# Altium PCB SeniorDesign_PowerBoard_Rev1.PcbDoc
Units mil, origin at the board's own origin, x right, y up, seen from the top; angles counter-clockwise.
Board outline 3000.05 x 2999.92 mil, 4 copper layers (Top Layer, Power, Ground, Bottom Layer), stack 64.6 mil thick; 60 components, 42 nets, 180 pads, 29 vias.
Unrouted connection lines stored in the file: 14.
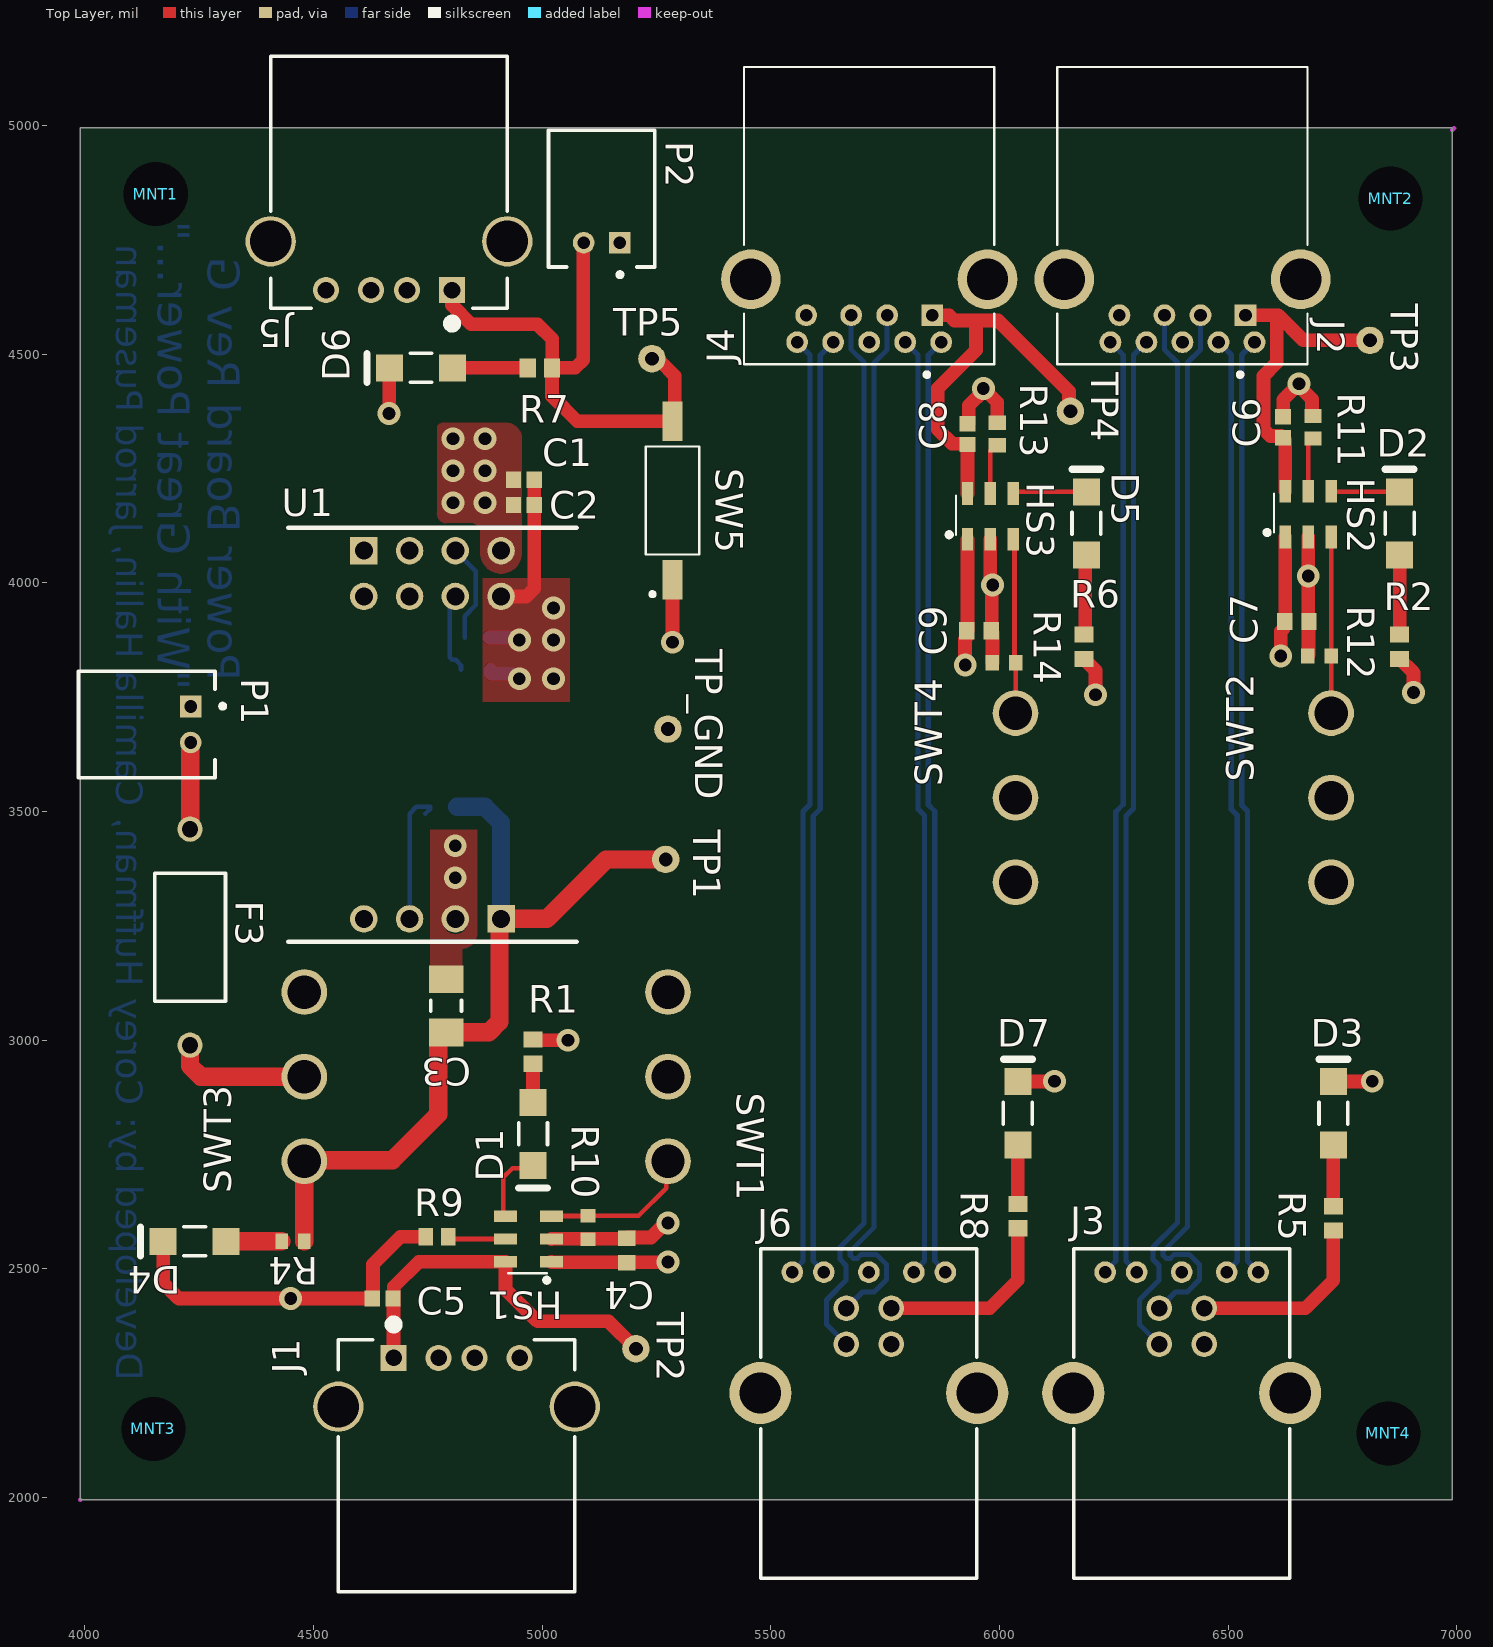
[diagram p0: Top Layer view]
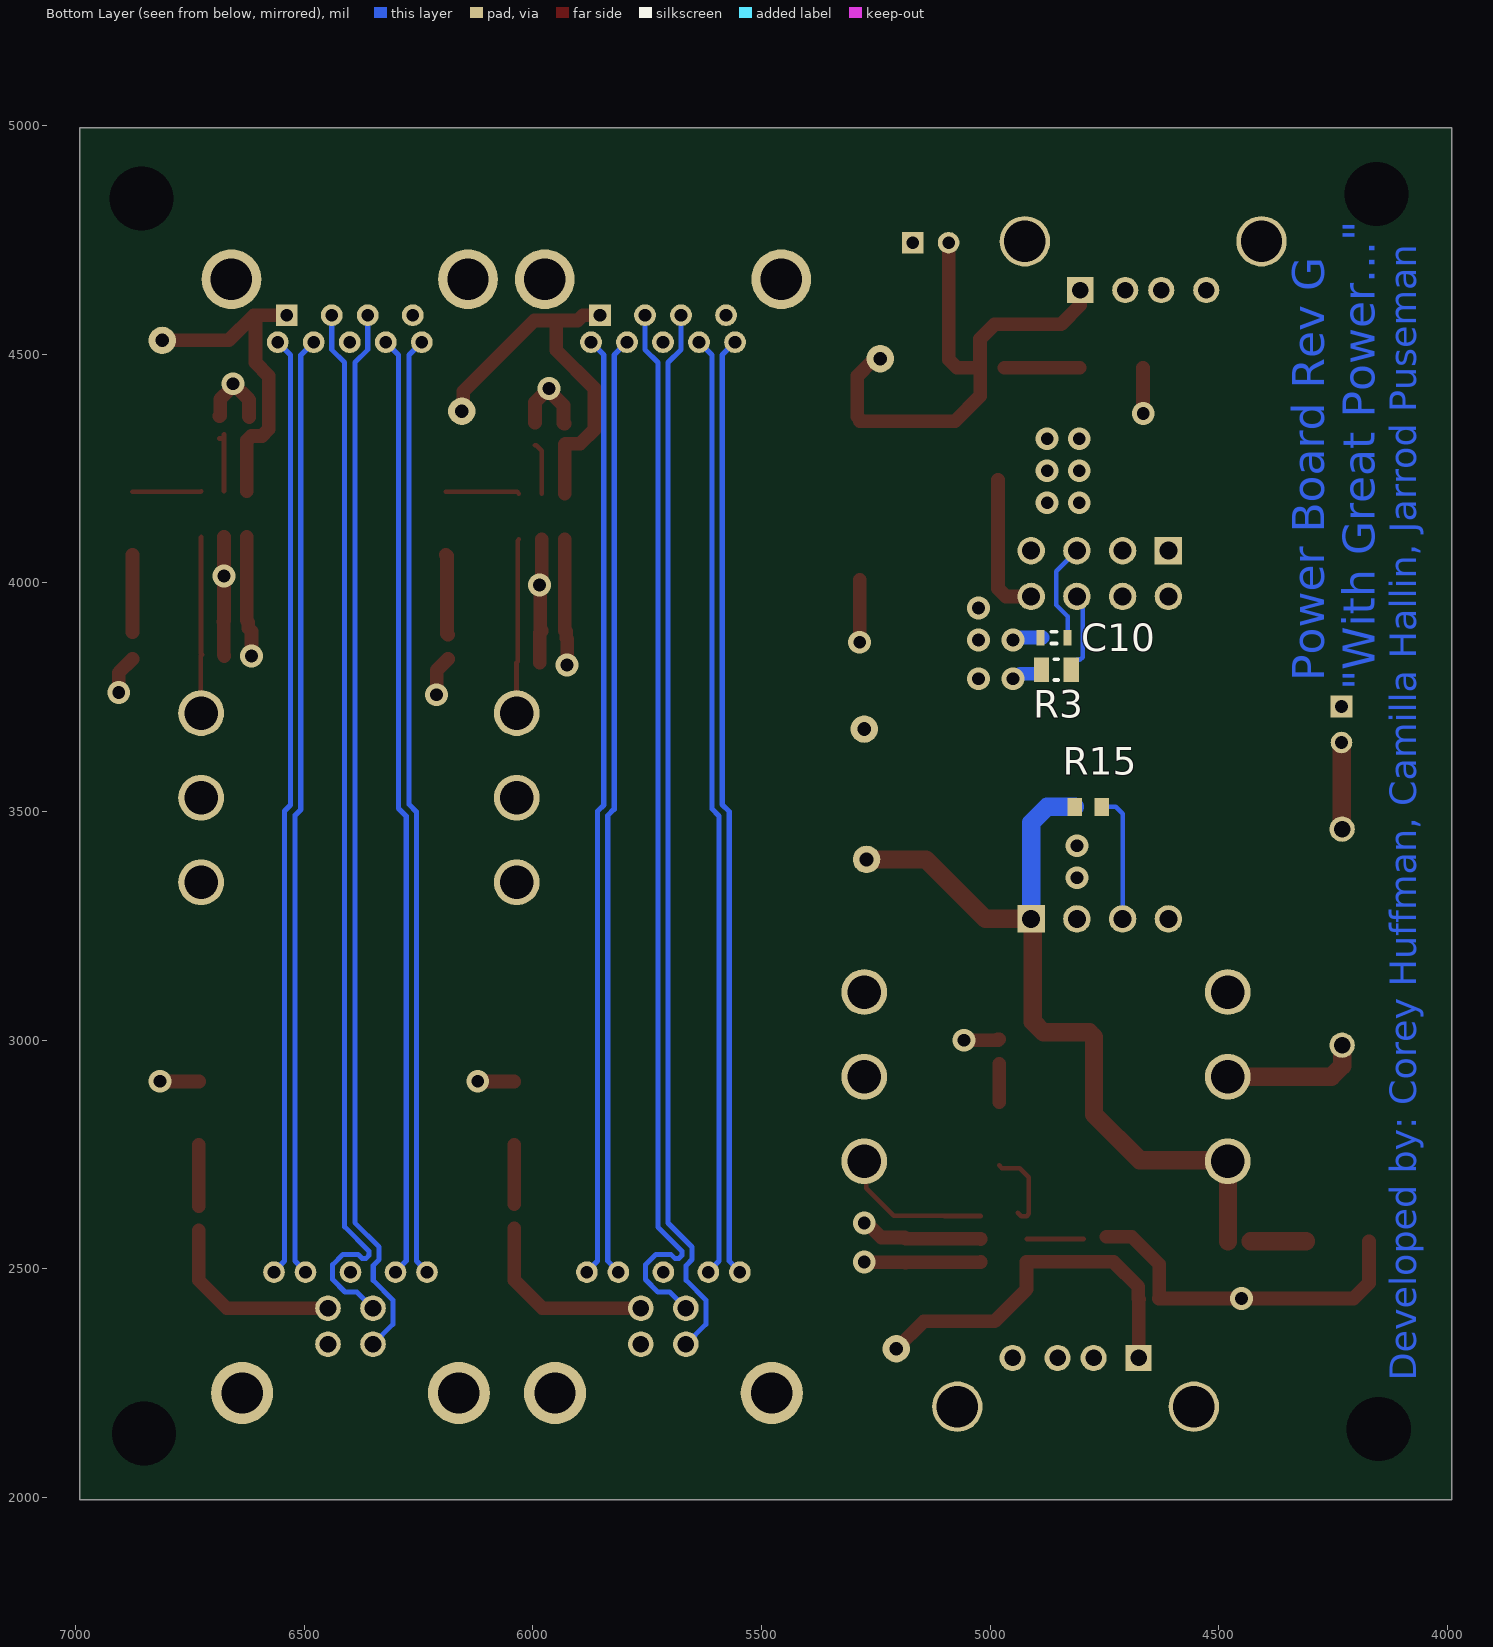
[diagram p1: Bottom Layer view, seen from below]
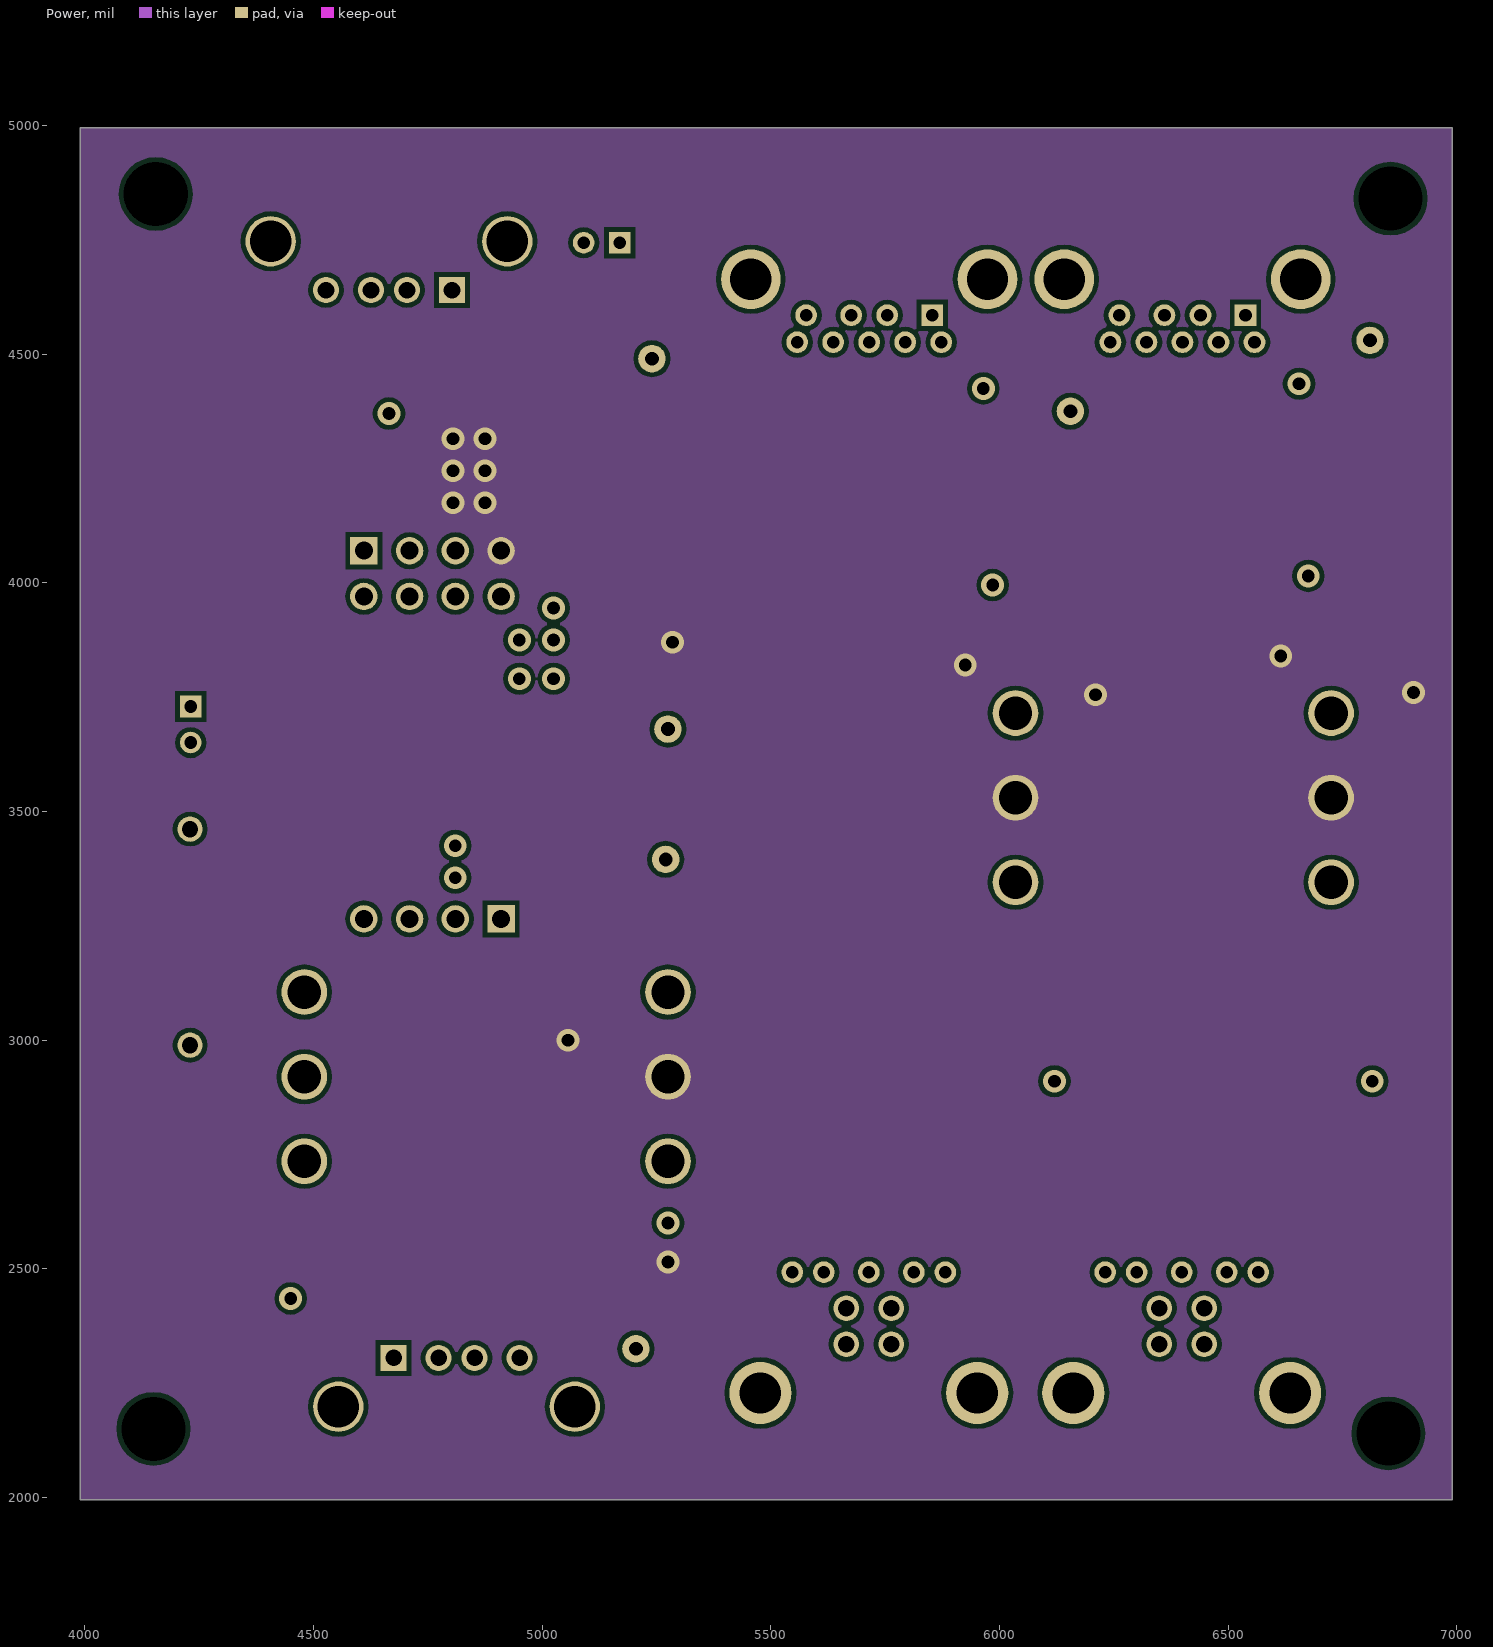
[diagram p2: Power]
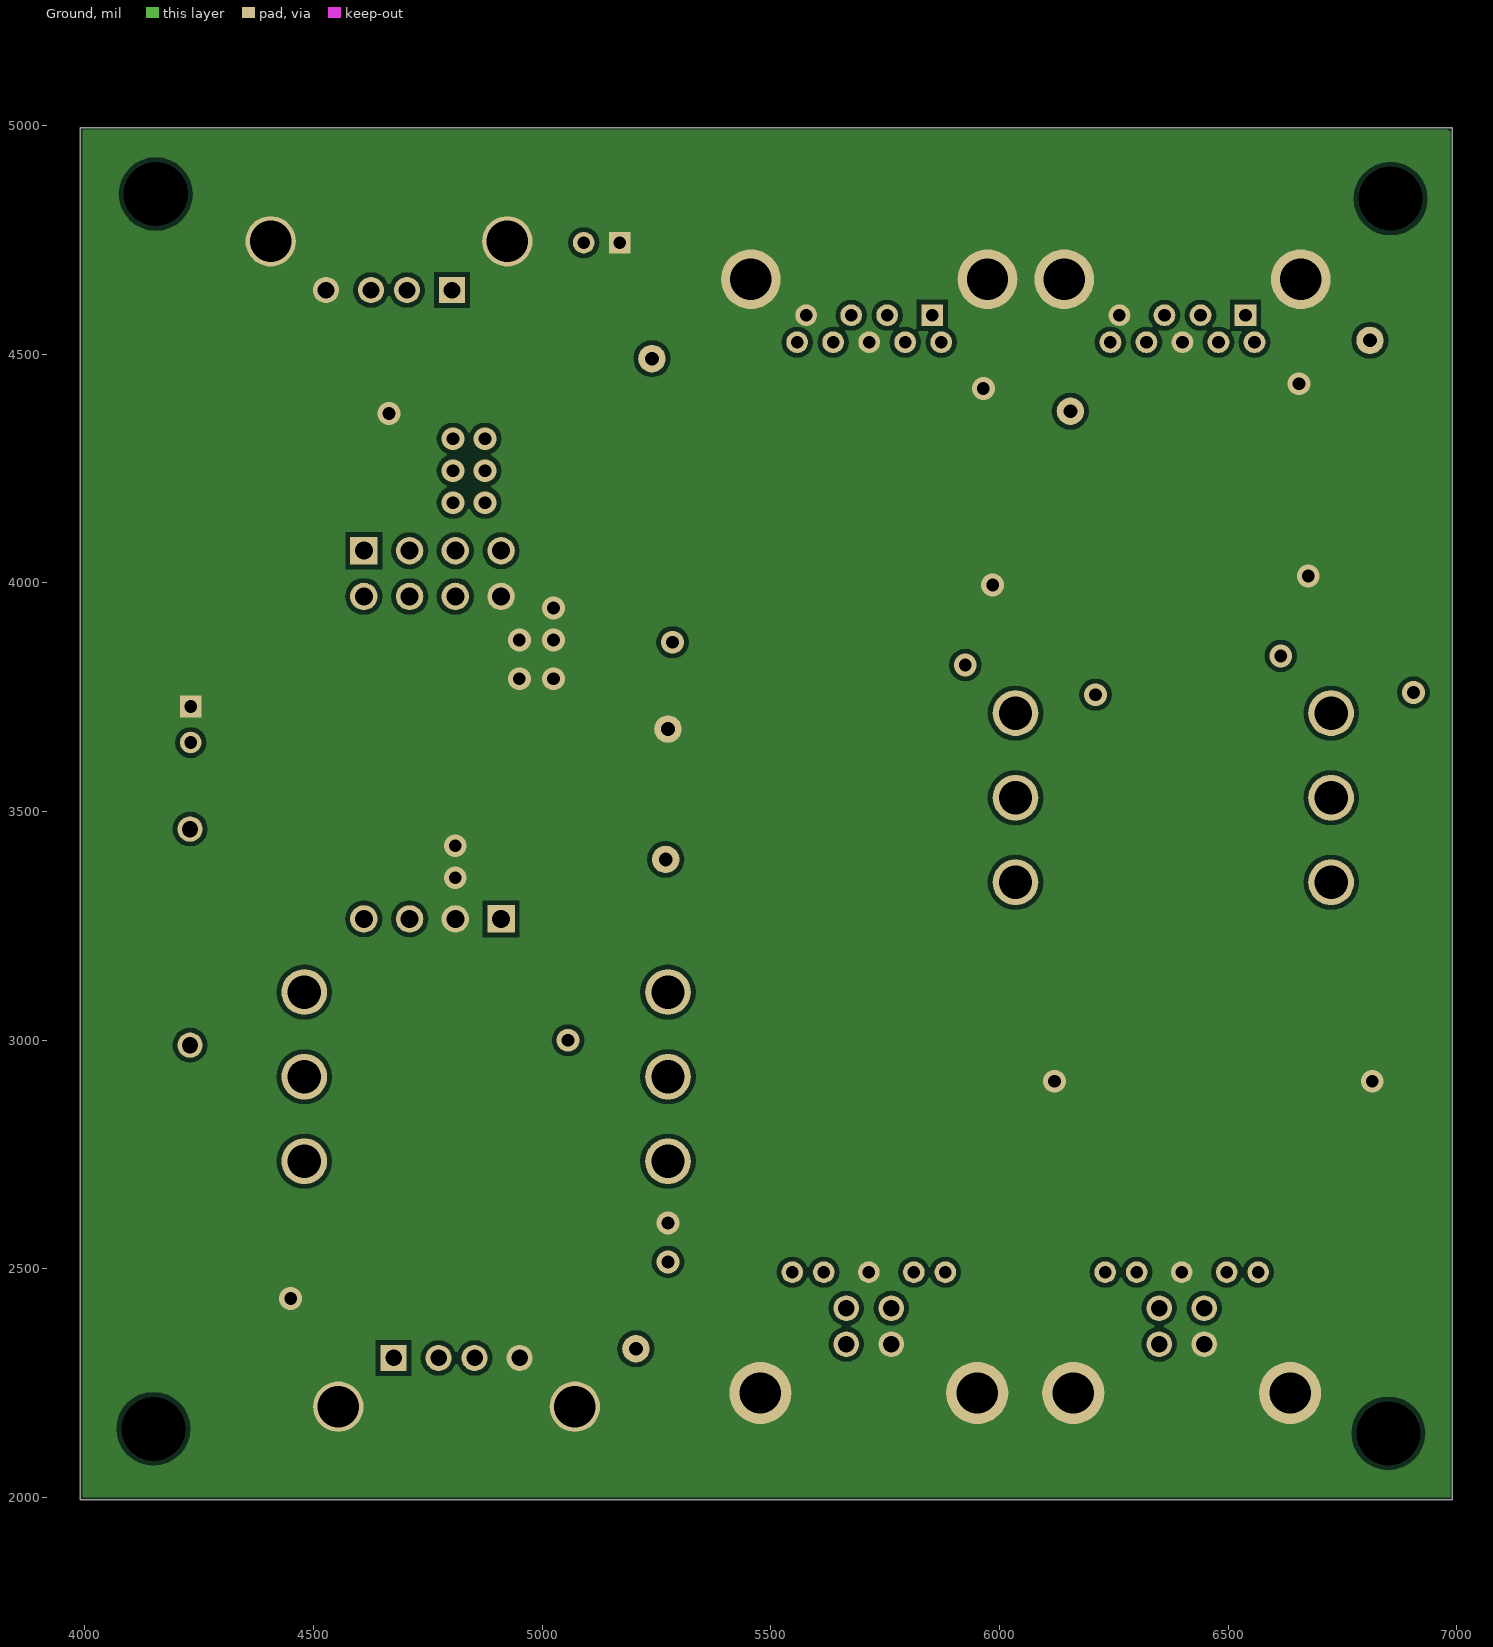
[diagram p3: Ground]

## Layer stack, top to bottom
Top Solder: solder mask 1, Solder Resist, Dk 3.5
Top Layer: signal copper 1.4
Dielectric 2: prepreg 6.7, FR-408, Dk 4.1
Power: signal copper 0.7
Dielectric 1: dielectric 47, FR-408, Dk 4.8
Ground: signal copper 0.7
Dielectric 3: prepreg 6.7, FR-408, Dk 4.1
Bottom Layer: signal copper 1.4
Bottom Solder: solder mask 1, Solder Resist, Dk 3.5

## Board outline
3989.95,1995.08 6990,1995.08 6990,4995 3989.95,4995

## Design rules (kind name [scope] priority, off if disabled: settings)
Clearance Clearance_1 [All] p1: gap=10 ignorepadtopadclearanceinfootprint=FALSE except(0: Arc-Hole Track-Hole SMDPad-Hole THPad-Hole Via-Hole Fill-Hole Poly-Hole Region-Hole Text-Hole)
Clearance [All] p2: gap=10 ignorepadtopadclearanceinfootprint=FALSE except(0: Arc-Hole Track-Hole SMDPad-Hole THPad-Hole Via-Hole Fill-Hole Poly-Hole Region-Hole Text-Hole)
DiffPairsRouting USB_DIFF_PAIR [All] p1: maxlimit=11 minlimit=10 mostfreqgap=11 toplayer_mingap=11 toplayer_minwidth=11 toplayer_maxwidth=11.5 toplayer_prefwidth=11.5 midlayer1_maxgap=10 midlayer1_prefgap=10 midlayer1_minwidth=15 midlayer1_maxwidth=15 midlayer1_prefwidth=15 midlayer2_maxgap=10 midlayer2_prefgap=10 midlayer2_minwidth=15 midlayer2_maxwidth=15 midlayer2_prefwidth=15 bottomlayer_mingap=11 bottomlayer_minwidth=11 bottomlayer_maxwidth=11.5 bottomlayer_prefwidth=11.5 maxuncoupledlength=500
DiffPairsRouting DiffPairsRouting_1 [All] p2: maxlimit=10 minlimit=10 mostfreqgap=10 toplayer_minwidth=15 toplayer_maxwidth=15 toplayer_prefwidth=15 midlayer1_minwidth=15 midlayer1_maxwidth=15 midlayer1_prefwidth=15 midlayer2_minwidth=15 midlayer2_maxwidth=15 midlayer2_prefwidth=15 bottomlayer_minwidth=15 bottomlayer_maxwidth=15 bottomlayer_prefwidth=15 maxuncoupledlength=500
Height [All] p1: minheight=0 maxheight=1500 prefheight=500
HoleSize [All] p1: absolutevalues=TRUE maxlimit=140 minlimit=1 maxpercent=80.000 minpercent=20.000
PlaneConnect [All] p1: planeconnectstyle=Direct reliefexpansion=20 reliefentries=4 reliefconductorwidth=10 reliefairgap=10
PolygonConnect [All] p1: connectstyle=Direct reliefconductorwidth=10 reliefentries=4 polygonreliefangle="90 Angle" airgapwidth=10
RoutingVias [All] p1: holewidth=28 width=50 viastyle="Through Hole" minholewidth=28 minwidth=50 maxholewidth=28 maxwidth=50
SolderMaskExpansion [All] p1: expansion=4 istentingtop=FALSE
Width 5V_Width [InNetClass('5V_Line')] p1: maxlimit=50 minlimit=10 preferedwidth=30 toplayer_minwidth=30 midlayer1_maxwidth=10 midlayer1_prefwidth=10 midlayer2_maxwidth=10 midlayer2_prefwidth=10 bottomlayer_minwidth=30 minimp=50.000000 maximp=50.000000 favimp=50.000000
Width 28V_Width [InNetClass('28V_Line')] p2: maxlimit=50 minlimit=10 preferedwidth=40 toplayer_minwidth=40 midlayer1_maxwidth=10 midlayer1_prefwidth=10 midlayer2_maxwidth=10 midlayer2_prefwidth=10 bottomlayer_minwidth=40 minimp=50.000000 maximp=50.000000 favimp=50.000000
Width C_GND [InNetClass('C_GND')] p3: maxlimit=50 minlimit=10 preferedwidth=30 toplayer_minwidth=30 midlayer1_maxwidth=10 midlayer1_prefwidth=10 midlayer2_maxwidth=10 midlayer2_prefwidth=10 bottomlayer_minwidth=30 minimp=50.000000 maximp=50.000000 favimp=50.000000
Width [All] p4: maxlimit=10 minlimit=10 preferedwidth=10
26 further rules are at their usual default settings.

## Classes and differential pairs
differential pair class USB_DIFF_PAIR: D2 D4 SSRX2 SSRX4 SSTX2 SSTX4
net class C_GND: GND
net class 28V_Line: NetC3_2 NetD4_1 NetF3_1 NetF3_2
net class 5V_Line: 5V NetC5_1 NetC6_1 NetC8_1 NetD1_1 NetD2_1 NetD3_1 NetD5_1 NetD6_1 NetD7_1 NetJ3_1 NetJ5_1 NetJ6_1
differential pair SSTX4: +SSTX4_P -SSTX4_N
differential pair SSTX2: +SSTX2_P -SSTX2_N
differential pair SSRX4: +SSRX4_P -SSRX4_N
differential pair SSRX2: +SSRX2_P -SSRX2_N
differential pair D4: +D4_P -D4_N
differential pair D2: +D2_P -D2_N

## Components (designator, comment, footprint, x,y, rotation, side; value= is the part's Value field where it differs from the comment)
C1 "GRM188R61A226ME15D" CAPC1608X100X38LL20T18 4960,4225 r180 top
C2 "GRM188R61A226ME15D" CAPC1608X100X38LL20T18 4960,4170 r180 top
C3 "GRM31CR71H475KA12L" MURA-1206_H_1.8_M 4790,3075 r270 top
C4 "GRM188R60J106ME47D" CAPC1608X90X35NL10T15 5185,2540 r270 top value=10uF
C5 "GRM188R61A226ME15D" CAPC1608X100X38LL20T18 4651.2,2434.88 r180 top
C6 "GRM188R61A226ME15D" CAPC1608X100X38LL20T18 6620,4340 r90 top
C7 "GRM188R60J106ME47D" CAPC1608X90X35NL10T15 6650,3915 r180 top value=10uF
C8 "GRM188R61A226ME15D" CAPC1608X100X38LL20T18 5930,4325 r90 top
C9 "GRM188R60J106ME47D" CAPC1608X90X35NL10T15 5955,3895 r180 top value=10uF
C10 "C1608X5R1H105K080AB" CAPC1608X90X20LL10 4860,3880 r0 bottom
D1 "HSMH-C150" AVAG-HSMX-C150_V 4980,2795 r270 top
D2 "HSMH-C150" AVAG-HSMX-C150_V 6875,4130 r90 top
D3 "HSMG-C150" AVAG-HSMX-C150_V 6730,2840 r90 top
D4 "HSMH-C150" AVAG-HSMX-C150_V 4240,2560 r180 top
D5 "HSMH-C150" AVAG-HSMX-C150_V 6190,4130 r90 top
D6 "HSMH-C150" AVAG-HSMX-C150_V 4735,4470 r180 top
D7 "HSMG-C150" AVAG-HSMX-C150_V 6040,2840 r90 top
F3 "0263.500WRT1L" LFUS-263-2_V1 4230,3225 r270 top
HS1 "HotSwap" Hot_Swap 4970,2565 r90 top
HS2 "HotSwap" Hot_Swap 6675,4150 r0 top
HS3 "HotSwap" Hot_Swap 5980,4145 r0 top
J1 "292303-1" TE-292303-1_V 4812.8,2259.96 r0 top
J2 "GSB311131HR" *AMPHENOL_GSB311131HR_GSB311131HR(Primary) 6400,4585 r180 top
J3 "692221030100" 692221030100 6398.32,2183.07 r0 top
J4 "GSB311131HR" *AMPHENOL_GSB311131HR_GSB311131HR(Primary) 5715,4585 r180 top
J5 "292303-1" TE-292303-1_V 4665,4685 r180 top
J6 "692221030100" 692221030100 5714.18,2183.07 r0 top
MNT1 ".14in" Screw_hole 4150,4845 r0 top locked
MNT2 ".14in" Screw_hole 6860,4845 r180 top locked
MNT3 ".14in" Screw_hole 4145,2145 r0 top locked
MNT4 ".14in" Screw_hole 6845,2135 r0 top locked
P1 "S2B-PH-K-S(LF)(SN)" JST-S2B-PH-K-S_V 4135,3690 r270 top
P2 "S2B-PH-K-S(LF)(SN)" JST-S2B-PH-K-S_V 5130,4840 r180 top
R1 "CRCW06031K00JNEB" RESC1609X50X30ML10T20 4980,2975 r90 top value=1kOhm
R2 "CRCW06031K00JNEB" RESC1609X50X30ML10T20 6875,3860 r270 top value=1kOhm
R3 "CRCW08050000Z0EA" RESC2013X50X30LL20T20 4855,3810 r180 bottom value=0Ohm
R4 "ERJ-3GEYJ153V" RESC1608X55X30LL15T15 4455,2560 r0 top value=15kOhm
R5 "CRCW06031K00JNEB" RESC1609X50X30ML10T20 6730,2610 r90 top value=1kOhm
R6 "CRCW06031K00JNEB" RESC1609X50X30ML10T20 6185,3860 r270 top value=1kOhm
R7 "CRCW06031K00JNEB" RESC1609X50X30ML10T20 4995,4470 r0 top value=1kOhm
R8 "CRCW06031K00JNEB" RESC1609X50X30ML10T20 6040,2615 r90 top value=1kOhm
R9 "CRCW060319K6FKEA" RESC1609X50X30NL10T20 4770,2570 r180 top value=19.6kOhm
R10 "ERJ3EKF1002V" RESC1609X55X30LL15T15 5100,2590 r270 top
R11 "CRCW060319K6FKEA" RESC1609X50X30NL10T20 6685,4340 r90 top value=19.6kOhm
R12 "ERJ3EKF1002V" RESC1609X55X30LL15T15 6700,3840 r180 top
R13 "CRCW060319K6FKEA" RESC1609X50X30NL10T20 5995,4325 r90 top value=19.6kOhm
R14 "ERJ3EKF1002V" RESC1609X55X30LL15T15 6010,3825 r180 top
R15 "RC0603FR-0710KL" RESC1608X55X25ML10T15 4785,3510 r180 bottom
SW5 "418121160801" 418121160801 5285,4180 r0 top
SWT1 "Toggle_Swt" Toggle_Swt 5275,2920 r90 top
SWT2 "Toggle_Swt" Toggle_Swt 6725,3530 r270 top
SWT3 "Toggle_Swt" Toggle_Swt 4480,2920 r90 top
SWT4 "Toggle_Swt" Toggle_Swt 6035,3530 r270 top
TP1 "TestPoint" TestPoint 5270,3395 r90 top
TP2 "TestPoint" TestPoint 5205,2325 r90 top
TP3 "TestPoint" TestPoint 6810,4530 r270 top
TP4 "TestPoint" TestPoint 6155,4375 r90 top
TP5 "TestPoint" TestPoint 5240,4490 r0 top
TP_GND "TestPoint" TestPoint 5275,3680 r90 top
U1 "DC/DC Converter" DCDC_Reg 4760,3665 r90 top

## Footprints (in the part's own frame and the unit in brackets; to place one, negate y for a bottom-side part, rotate by r counter-clockwise, add the part's x,y. Pads: shape width x height; smd on the part's side, far side on the other; paste and mask are expansions set on the pad)
418121160801 [mm] "01p, 2.54mm Pitch, Horizontal, IC Type, SMT, flat Actuator, black, with Tape, T&R"
  rect 1.1x2.2 smd: 1(0,-4.4) 2(0,4.4)
  silkscreen extent -1.49,-5.31 1.49,3, body extent -1.49,-4.95 1.49,4.95, height 3.26
692221030100 [mm] "USB 3.0 Type B Horizontal"
  round 1.42 hole 0.92: 1(1.25,5.86) 2(-1.25,5.86) 3(-1.25,3.86) 4(1.25,3.86)
  round 1.2 hole 0.7: 5(-4.25,7.86) 6(-2.5,7.86) 7(0,7.86) 8(2.5,7.86) 9(4.25,7.86)
  round 3.45 hole 2.3: Shell(-6.02,1.15) Shell(6.02,1.15)
  silkscreen extent -6,-9.15 6,9.15, body extent -7.2,-9.15 7.2,9.15, height 12.93
*AMPHENOL_GSB311131HR_GSB311131HR(Primary) [mm]
  rect 1.208x1.208 hole 0.7: 1(-3.5,0)
  round 1.208 hole 0.7: 2(-1,0) 3(1,0) 4(3.5,0) 5(4,1.5) 6(2,1.5) 7(0,1.5) 8(-2,1.5) 9(-4,1.5)
  round 3.316 hole 2.3: SH1(-6.57,-2) SH2(6.57,-2)
  silkscreen extent -6.95,-13.78 6.95,3.42, body extent -7.91,-13.71 7.91,2.79, height 7.57
AVAG-HSMX-C150_V [mm] "SMD, 2-Leads, Body 3.2x1.6mm"
  rect 1.5x1.5 smd: 1(-1.75,0) 2(1.75,0)
  silkscreen extent -0.6,-0.8 3,0.8, body extent -1.6,-0.8 1.6,0.8, height 1.1
CAPC1608X90X20LL10 [mm] "Chip Capacitor, 2-Leads, Body 1.70x0.90mm, IPC High Density"
  rect 0.45x0.85 smd: 1(-0.75,0) 2(0.75,0)
  silkscreen extent -0.15,-0.33 0.15,0.33, body extent -0.85,-0.45 0.85,0.45, height 0.9
CAPC1608X90X35NL10T15 [mm] "Chip Capacitor, 2-Leads, Body 1.60x0.80mm, IPC Medium Density"
  rect 0.85x0.95 smd: 1(-0.675,0) 2(0.675,0)
  body extent -0.85,-0.45 0.85,0.45, height 0.9
CAPC1608X100X38LL20T18 [mm] "Chip Capacitor, 2-Leads, Body 1.80x1.00mm, IPC High Density"
  rect 0.85x0.9 smd: 1(-0.575,0) 2(0.575,0)
  body extent -0.9,-0.5 0.9,0.5, height 1
DCDC_Reg [mil]
  round 60 hole 39.37: 1(-400,150) 2(-400,50) 3(-400,-50) 5(305,150) 6(305,50) 7(305,-50) 8(305,-150) 9(405,-150) 10(405,-50) 11(405,50)
  rect 60x60 hole 39.37: 4(-400,-150) 12(405,150)
  Top Layer pour cut-out: -40,-140
  silkscreen extent -450,-315 455,315, body extent -450,-315 455,320, height 256
Hot_Swap [mil]
  rect 25x50 smd: 1(-50,-50) 2(0,-50) 3(50,-50) 4(50,50) 5(0,50) 6(-50,50)
  silkscreen extent -95,-45 -75,45, body extent -65,-35 65,40, height 51
JST-S2B-PH-K-S_V [mm] "THD, 2-Leads, Body 7.6x5.9mm, Pitch 2mm"
  rect 1.2x1.2 hole 0.7: 1(-1,2.45)
  round 1.2 hole 0.7: 2(1,2.45)
  silkscreen extent -2.95,-3.8 2.95,4.35, body extent -2.95,-3.8 2.95,3.8, height 4.8
LFUS-263-2_V1 [mm] "Axial Lead, 2-Leads, Dia 3.94mm, Body Length 7.11mm, Pin Spacing 12mm"
  round 1.4 hole 0.9: 1(-6,0) 2(6,0)
  silkscreen extent -3.55,-1.97 3.55,1.97, body extent -6.32,-1.96 6.32,1.96, height 3.94
MURA-1206_H_1.8_M [mm] "SMD, 2-Leads, Body 3.4x1.8mm, IPC Low Density"
  rect 1.55x1.9 smd: 1(-1.475,0) 2(1.475,0)
  silkscreen extent -0.3,-0.85 0.3,0.85, body extent -1.7,-0.9 1.7,0.9, height 1.8
RESC1608X55X25ML10T15 [mm] "Chip Resistor, 2-Leads, Body 1.60x0.80mm, IPC Low Density"
  rect 0.8x1 smd: 1(-0.75,0) 2(0.75,0)
  body extent -0.85,-0.45 0.85,0.45, height 0.55
RESC1608X55X30LL15T15 [mm] "Chip Resistor, 2-Leads, Body 1.60x0.80mm, IPC High Density"
  rect 0.7x0.85 smd: 1(-0.625,0) 2(0.625,0)
  body extent -0.87,-0.48 0.87,0.48, height 0.55
RESC1609X50X30ML10T20 [mm] "Chip Resistor, 2-Leads, Body 1.55x0.85mm, IPC Low Density"
  rect 0.9x1.05 smd: 1(-0.675,0) 2(0.675,0)
  body extent -0.82,-0.48 0.82,0.48, height 0.5
RESC1609X50X30NL10T20 [mm] "Chip Resistor, 2-Leads, Body 1.55x0.85mm, IPC Medium Density"
  rect 0.8x0.95 smd: 1(-0.625,0) 2(0.625,0)
  body extent -0.82,-0.48 0.82,0.48, height 0.5
RESC1609X55X30LL15T15 [mm] "Chip Resistor, 2-Leads, Body 1.75x0.95mm, IPC High Density"
  rect 0.75x0.85 smd: 1(-0.65,0) 2(0.65,0)
  body extent -0.87,-0.48 0.87,0.48, height 0.55
RESC2013X50X30LL20T20 [mm] "Chip Resistor, 2-Leads, Body 2.00x1.25mm, IPC High Density"
  rect 0.85x1.35 smd: 1(-0.825,0) 2(0.825,0)
  silkscreen extent -0.1,-0.58 0.1,0.58, body extent -1.1,-0.72 1.1,0.72, height 0.5
Screw_hole [mil]
  round 60 hole 140: 10(5,5)
  body extent -97,-100 108,105, height 426
TE-292303-1_V [mm] "THD, 4-Leads, Body 13.13x14mm, Pitch 2.5mm"
  rect 1.45x1.45 hole 0.92: 1(-3.5,1.144)
  round 1.45 hole 0.92: 2(-1,1.144) 3(1,1.144) 4(3.5,1.144)
  round 2.8 hole 2.3: 5(-6.57,-1.566) 6(6.57,-1.566)
  silkscreen extent -6.57,-11.85 6.57,3.25, body extent -8.12,-11.85 8.12,2.15, height 7.72
TestPoint [mil]
  round 60 hole 30: Power(0,0)
Toggle_Swt [mil]
  round 100 hole 73: 1(-185,0) 2(0,0) 3(185,0)
  body extent -250,-135 250,135, height 1157

## Part data
C1 C2 C5 C6 C8: library part CMP-2000-06337-1, "Chip Capacitor, 22 uF, +/- 20%, 10 V, -55 to 85 degC, 0603 (1608 Metric), RoHS, Tape and Reel", Capacitance=22uF, Case Code - in=0603, Case Code - mm=1608, Dielectric=X5R, Manufacturer=Murata, Maximum Operating Temperature=+85C, Minimum Operating Temperature=-55C, Package / Case=0603(1608metric), Package Description="2-Pin Surface Mount Device, Body 1.6 x 0.8 mm", Tolerance=20%, Voltage Rating DC=10VDC, Brand=MurataElectronics, Datasheet URL=http://download.siliconexpert.com/pdfs/2016/4/15/5/14/5/748/mrt_/manual/267693161154190grm188r61a226me1523.pdf, Datasheet Version=04/2016, Factory Pack Quantity=4000, Height=0.8mm, Length=1.6mm, Manufacturer URL=http://www.murata.com/, Mounting Technology=SurfaceMount, Package Reference=1608, Packaging=Reel, Product=GeneralTypeMLCCs, Product Category=MultilayerCeramicCapacitorsMLCC-SMD/SMT, RoHS=True, Series=GRM, Termination Style=SMD/SMT, Type=VoltageandTemperatureDeratingRecommendedProduct, Unit Weight=0.000222oz, Width=0.8mm
C3: library part CMP-2000-05258-1, "CAP, Ceramic, 4.7 uF, 10%, 50 V, 1206, RoHS, Tape and Reel", Capacitance=4700000pF, Case Size/Dimension=1206, Dielectric=X7R, Manufacturer=Murata, Rated Voltage=50V, Tolerance (%)=±10%, Datasheet URL=https://datasheet.ciiva.com/29201/451984-da-01-en-vs-kondensator-0603-29201725.pdf, Datasheet Version=Dec-10, Manufacturer URL=http://www.murata.com/
C4 C7 C9: library part CMP-2006-02792-1, Manufacturer=Murata, Part Number=GRM188R60J106ME47D
C10: library part CMP-2000-06025-1, "Chip Capacitor, 1 uF, +/- 10%, 50 V, -55 to 85 degC, 0603 (1608 Metric), RoHS, Tape and Reel", Capacitance=1µF, Manufacturer=TDK, Operating Temperature=-55°C~85°C, Package / Case=0603(1608Metric), Package Description="2-Pin Surface Mount Device, Body 1.6 x 0.8 mm", Package Reference=0603, PCN Part Number=MLCCPartNumberChange30/Nov/2012, Ratings=-, Standard Package=1, Temperature Coefficient=X5R, Tolerance=±10%, Voltage - Rated=50V, Applications=GeneralPurpose, Category=Capacitors, Datasheet URL=https://product.tdk.com/info/en/catalog/datasheets/mlcc_commercial_general_en.pdf, Datasheet Version=08/2016, Design Resources=20WNon-IsolatedBuckLEDDriverUsingPLLNK460KG, Family=CeramicCapacitors, Features=-, Height - Seated (Max)=-, Lead Spacing=-, Lead Style=-, Manufacturer URL=http://www.tdk.com/, Mounting Technology=SurfaceMount, Mounting Type=SurfaceMount,MLCC, Online Catalog=CSeries,GeneralPurpose, Other Names=445-7468-6, Packaging=Digi-Reel®, Product Training Modules=CSeriesGeneralApplicationsSEAT,CCV,andTVCLDesignToolsGuidetoReplacinganElectrolyticCapacitorwithanMLCC, RoHS Information=RoHSCertificate-MLCC, Series=C, Size / Dimension="0.063\"Lx0.031\"W(1.60mmx0.80mm)", Thickness (Max)="0.035\"(0.90mm)"
D1 D2 D4 D5 D6: library part CMP-2000-06426-1, "LED Uni-Color Red, 65 mW, 25 mA, -40 to 85 degC, 2-Pin SMD, RoHS, Tape and Reel", Emitting Color=Red, Forward Current=25mA, Forward Voltage=2.6V, Manufacturer=Avago, Operating Temp Range=-40Cto85C, Operating Temperature Classification=Industrial, Package Description="2-Pin Surface Mount Device, Body 3.2 x 1.6 mm", Package Reference=HSMX-C150, Package Type=ChipLed, Power Dissipation=78W, Reverse Voltage=5V, Test Current (It)=20mA, Chip Material=GaAlAs, Datasheet URL=http://media.digikey.com/pdf/Data%20Sheets/Avago%20PDFs/HSMz-Czzz.pdf, Datasheet Version=03/2012, DELETED=Compliant, Dominant Wave Length=639nm, High Brightness=No, Lens Dimensions=2x1.6x0.6mm, Lens Type=ColorlessDiffused, Lum Intensity=17mcd, Luminous Intensity=17mcd, Main Category=ChipLED, Manufacturer URL=http://www.avagotech.com/, Mounting=SurfaceMount, Mounting Technology=SurfaceMount, Number of  Elements=1, Packaging=TapeandReel, Peak Wavelength=660nm, Pin Count=2, Product Depth (mm)=1.6mm, Product Height (mm)=1.1mm, Product Length (mm)=3.2mm, Rad Hardened=No, Shape Type=Rectangular, Type=Uni-Color, Viewing Angle=170deg
D3 D7: library part CMP-2000-05061-1, "Chip LED, Green, 65 mW, 25 mA, -40 to 85 degC, 2-Pin SMD, RoHS, Tape and Reel", Forward Current If=20mA, Forward Voltage=2.2V, Forward Voltage VF Max=2.6V, LED Colour=Green, Manufacturer=Avago, Operating Temperature Max=85degC, Operating Temperature Min=-30degC, Operating Temperature Range=-30degCto+85degC, Opto Case Style=SMD, Package Description="2-Pin Surface Mount Device, Body 3.2 x 1.6 mm", Package Reference=HSMX-C150, Reverse Protection Voltage=5V, Storage Temperature Min=-40degC, Bulb Size=1.6mmx2mm, Datasheet URL=https://datasheet.ciiva.com/11774/0900766b804a6539-11774272.pdf, Datasheet Version=Mar-12, Dominant Wavelength=572nm, External Depth=1.1mm, External Length / Height=3.2mm, External Width=1.6mm, Forward Current If Max=20mA, LED Mounting=SMD, LED Type=Standard, Lens Shape=Rectangular, Light Output Orientation=TopEmitting, Luminous Intensity=15mcd, Luminous Intensity @ If Min=4.5mcd, Luminous Intensity Typ=15mcd, Manufacturer URL=http://www.avagotech.com/, Material=GaP, Mounting Type=SMD, MSL=MSL2A-4weeks, No. of Pins=2, Opto Mounting Orientation=Top, Packaging=CutTape, Peak Wavelength=570nm, PIV Max=5V, Storage Temperature Max=85degC, SVHC=NoSVHC(16-Jun-2014), Viewing Angle=170deg, Voltage Vf Min=2.2V, Voltage Vf Typ=2.2V, Wavelength Typ=572nm
F3: library part CMP-0951-00001-1, "Very Fast-Acting Subminiature Fuse, 250 V, 0.5 A, 2-Pin Axial Leaded, Dia 3.94 mm, Body Length 7.11 mm, RoHS, Tape and Reel", Ampere Rating="0.5 A", Case/Package=Axial, Current=1A, DC Cold Resistance=128mR, Flammability Rating="UL94 V-0", Manufacturer=Littelfuse, Manufacturer Part Number=0251001.NRT1L, Max Operating Temperature=125°C, Min Operating Temperature=-55°C, Nominal Voltage Drop="0.302 mV", Package Quantity=5000, Supplier Part Number 1=F5563CT-ND, Temp. Range="-55 to 125 degC", Typical Cold Resistance="0.332 Ohm", Voltage Rating="250 V", Voltage Rating (AC)=125V, Approvals=UL,CSA,QPL, Category=Fuses, ComponentLink1Description="Manufacturer URL", ComponentLink1URL=http://www.littelfuse.com/, ComponentLink2Description=Datasheet, ComponentLink2URL=http://www.littelfuse.com/~/media/electronics/datasheets/fuses/littelfuse_fuse_263_datasheet.pdf.pdf, ComponentLink3Description=https://datasheet.ciiva.com/19467/1710477-19467260.pdf?src-supplier=Jameco, ComponentLink3URL=https://datasheet.ciiva.com/19467/1710477-19467260.pdf?src-supplier=Jameco, ComponentLink4Description=https://datasheet.ciiva.com/299/littelfuse-fuse-251-253-datasheet-pdf-299892.pdf?src-supplier=Digi-Key, ComponentLink4URL=https://datasheet.ciiva.com/299/littelfuse-fuse-251-253-datasheet-pdf-299892.pdf?src-supplier=Digi-Key, ComponentLink5Description=https://datasheet.ciiva.com/15187/getdatasheetpartid-107158-15187077.pdf?src-supplier=Verical, ComponentLink5URL=https://datasheet.ciiva.com/15187/getdatasheetpartid-107158-15187077.pdf?src-supplier=Verical, ComponentLink6Description=https://datasheet.ciiva.com/1548/88912-1548966.pdf?src-supplier=Element14, ComponentLink6URL=https://datasheet.ciiva.com/1548/88912-1548966.pdf?src-supplier=Element14, ComponentLink7Description=https://datasheet.ciiva.com/14537/70184694-14537127.pdf?src-supplier=Allied+Electronics, ComponentLink7URL=https://datasheet.ciiva.com/14537/70184694-14537127.pdf?src-supplier=Allied+Electronics, ComponentLink8Description=https://datasheet.ciiva.com/4485/251-253-45293-4485807.pdf?src-supplier=Mouser, ComponentLink8URL=https://datasheet.ciiva.com/4485/251-253-45293-4485807.pdf?src-supplier=Mouser, ComponentLink9Description=https://datasheet.ciiva.com/15187/getdatasheetpartid-116772-15187141.pdf?src-supplier=Verical, ComponentLink9URL=https://datasheet.ciiva.com/15187/getdatasheetpartid-116772-15187141.pdf?src-supplier=Verical, ComponentLink10Description=https://datasheet.ciiva.com/301/littelfuse-fuse-251-253-datasheet-pdf-301627.pdf?src-supplier=Digi-Key, ComponentLink10URL=https://datasheet.ciiva.com/301/littelfuse-fuse-251-253-datasheet-pdf-301627.pdf?src-supplier=Digi-Key, ComponentLink11Description=https://datasheet.ciiva.com/1548/88912-1548971.pdf?src-supplier=Element14, ComponentLink11URL=https://datasheet.ciiva.com/1548/88912-1548971.pdf?src-supplier=Element14, ComponentLink12Description=https://datasheet.ciiva.com/28468/88912-28468491.pdf?src-supplier=Element14, ComponentLink12URL=https://datasheet.ciiva.com/28468/88912-28468491.pdf?src-supplier=Element14, ComponentLink13Description=https://datasheet.ciiva.com/301/littelfuse-fuse-251-253-datasheet-pdf-301628.pdf?src-supplier=Digi-Key, ComponentLink13URL=https://datasheet.ciiva.com/301/littelfuse-fuse-251-253-datasheet-pdf-301628.pdf?src-supplier=Digi-Key, ComponentLink14Description=https://datasheet.ciiva.com/26845/getdatasheetpartid-732945-26845515.pdf?src-supplier=Verical, ComponentLink14URL=https://datasheet.ciiva.com/26845/getdatasheetpartid-732945-26845515.pdf?src-supplier=Verical, ComponentLink15Description=https://datasheet.ciiva.com/7494/littelfuse-fuse-251-253-datasheet-pdf-7494700.pdf?src-supplier=Digi-Key, ComponentLink15URL=https://datasheet.ciiva.com/7494/littelfuse-fuse-251-253-datasheet-pdf-7494700.pdf?src-supplier=Digi-Key, Current Rating=1A, DatasheetVersion=Dec-13, Diameter=2.41mm, Fuse Type="Board Mount (Cartridge Style Excluded)", Housing Material=Ceramic, Lead Free="Lead Free", Length=7.11mm, Mount="Through Hole", Mounting Technology="Through Hole", Number of Pins=2, PackageDescription="2-Pin Axial Lead, Dia 3.94 mm, Body Length 7.11 mm", PackageReference=263-2, Packaging="Tape and Reel", Packing="Tape and Reel", PartNumber=0263.500WRT1L, Pricing 1="1=0.93000, 5=0.90600, 10=0.84700, 50=0.70060, 100=0.58390, 250=0.56928, 500=0.48170, 1000=0.42331 (USD)", Radiation Hardening=No, Resistance=128mR, RoHS=TRUE, Stock 1=13360, Supplier 1=Digi-Key, Termination=Axial, Voltage Rating (DC)=125V
HS1 HS2 HS3: Supplier Part Number 1=1028-1319-1-ND, Supplier 1=Digi-Key
J1 J5: library part CMP-2000-05404-1, "1 Port Right Angle Through Hole Mount Female Type A USB Connector, 4 Position, -55 to 85 degC, RoHS, Tube", Manufacturer="TE Connectivity", Package Description="4-Pin Through Hole Device, Body 14 x 13.13 mm, Pitch 2.5 mm", Connector Mounting=PCB, Connector Type=USBA, Contact Material=Copper, Contact Plating=Gold, Contact Termination Type=Solder, Datasheet URL=http://www.farnell.com/cad/1653030.pdf, Datasheet Version=Feb-12, Gender=Receptacle, Manufacturer URL=http://www.te.com/, No. of Contacts=4, Package Reference=292303-1, SVHC=NoSVHC(16-Jun-2014)
J2 J4: "CONN RCPT USB3.0 TYPEA 9POS R/A", Flammability Rating="UL94 V-0", Insulation Resistance=100MR, Manufacturer="Amphenol Commercial", Package=None, Package Quantity=1170, Supplier Part Number 1=523-GSB311131HR, Category=Connectors, ComponentLink1Description=https://datasheet.ciiva.com/851/gsb311131hr20drawing-851348.pdf?src-supplier=Digi-Key, ComponentLink1URL=https://datasheet.ciiva.com/851/gsb311131hr20drawing-851348.pdf?src-supplier=Digi-Key, ComponentLink2Description=https://datasheet.ciiva.com/3897/0typea-3897736.pdf?src-supplier=Arrow, ComponentLink2URL=https://datasheet.ciiva.com/3897/0typea-3897736.pdf?src-supplier=Arrow, ComponentLink3Description=https://datasheet.ciiva.com/4598/0typea-184113-4598751.pdf?src-supplier=Mouser, ComponentLink3URL=https://datasheet.ciiva.com/4598/0typea-184113-4598751.pdf?src-supplier=Mouser, Connector Type=USB,Receptacle, Contact Material=Bronze, Contact Plating=Gold, Depth=16.5mm, Digi-Key_Part_Number=GSB311131HR-ND, Digi-Key_Purchase_URL=https://www.digikey.com/product-detail/en/amphenol-icc-commercial-products/GSB311131HR/GSB311131HR-ND/2187173?utm_source=snapeda&utm_medium=aggregator&utm_campaign=symbol, Gender=Receptacle, Length=14.4mm, Manufacturer Part Number=GSB311131HR, MF="Amphenol ICC", Mount="Through Hole,Horizontal,Surface Mount", MP=GSB311131HR, Number of Contacts=9, Number of Ports=1, Number of Terminals=9, Orientation="Right Angle", Packaging=Tray, Pitch=2mm, Pricing 1="2340=0.87000, 4680=0.83860, 5148=0.82920, 23400=0.81260 (USD)", Pricing 2="1=1.60000, 10=1.45000, 25=1.36000, 50=1.30000, 100=1.24000, 250=1.12000 (USD)", Radiation Hardening=No, REACH SVHC=Unknown, RoHS=Yes, SnapEDA_Link=https://www.snapeda.com/parts/GSB311131HR/Amphenol%20FCI/view-part/229215/?ref=snap, Stock 1=1577, Stock 2=1512, Supplier 1=Mouser, Termination=Solder, USB Standard="USB 3.0"
J3 J6: library part CMP-1502-03224-1, "USB 3.0 Type B Receptacle WR-COM, Horizontal, THT", Contact Resistance=50mOhm, Manufacturer="Wurth Elektronik", Operating Temperature=-20to85degC, Rated Current=0.25A, Working Voltage=30VAC, Connector Type=USB3.0TypeB, Datasheet URL=https://katalog.we-online.de/em/datasheet/692221030100.pdf, Gender=Receptacle, Manufacturer URL=http://www.we-online.de, Mounting Technology=THT, Orientation=Horizontal, Package Reference=692221030100, Packaging=Tray, Part Number=692221030100, Publisher=WurthElektronik
MNT1 MNT2 MNT3 MNT4: library part MNTHOLE, "Mounting whole for 1/8\" screw"
P1 P2: library part CMP-1755-00004-1, "Male Header, Pitch 2 mm, 1 x 2 Position, Height 4.8 mm, Tail Length 3.4 mm, -25 to 85 degC, RoHS, Bulk", Capacitance="10 uF", Case\Package=Radial, Max Operating Temperature="85 degC", Min Operating Temperature="-40 degC", Package Quantity=200, Tolerance=20%, Voltage Rating="50 V", ComponentLink1Description=Datasheet, ComponentLink1URL=http://www.jst-mfg.com/product/pdf/eng/ePH.pdf, DatasheetVersion=Dec-12, Diameter="5 mm", Height="11 mm", Lead Pitch="2 mm", Length="11 mm", Mount="Through Hole", PackageDescription="Male Header, Pitch 2 mm, 1 x 2 Position, Height 4.8 mm, Tail Length 3.4 mm", PackageReference=S2B-PH-K-S, Packaging=Bulk, Pins=2, Radiation Hardening=No, REACH SVHC="No SVHC", RoHSCompliant=true, Voltage Rating (DC)="50 V"
R1 R2 R5 R6 R7 R8: library part CMP-2000-02973-1, Manufacturer="Vishay Dale", Part Number=CRCW06031K00JNEB
R3: library part CMP-2001-04896-1, Manufacturer="Vishay Dale", Part Number=CRCW08050000Z0EA
R4: library part CMP-2000-00725-1, Manufacturer=Panasonic, Part Number=ERJ-3GEYJ153V
R9 R11 R13: library part CMP-2000-02969-1, Manufacturer="Vishay Dale", Part Number=CRCW060319K6FKEA
R10 R12 R14: library part CMP-2000-07452-1, "Chip Resistor, 10 KOhm, +/- 1%, 0.1 W, -55 to 155 degC, 0603 (1608 Metric), RoHS, Tape and Reel", Case Code (Imperial)=0603, Case Code (Metric)=1608, Manufacturer=Panasonic, Max Operating Temperature=155degC, Max Power Dissipation=100mW, Min Operating Temperature=-55degC, Package Description="2-Pin Surface Mount Device, Body 1.6 x 0.85 mm", Package Quantity=1, Package Reference=603, Resistance=10KOhm, Temperature Coefficient=100ppm\/degreesC, Tolerance=1%, Voltage Rating=75V, Case\/Package=0603, Composition=ThickFilm, Contact Plating=Tin, Datasheet URL=https://industrial.panasonic.com/cdbs/www-data/pdf/RDA0000/AOA0000C304.pdf, Datasheet Version=02/2017, Depth=0.8mm, Height=0.45mm, Lead Free=LeadFree, Length=1.6mm, Manufacturer URL=http://www.panasonic.com/, Military Standard=Not, Mount=SurfaceMount, Mounting Technology=SurfaceMount, Number of Pins=2, Number of Terminations=2, Packaging=TapeandReel, Power Rating=100mW, Radiation Hardening=No, REACH SVHC=NoSVHC, RoHSCompliant=true, Termination=SMD/SMT, Voltage Rating (DC)=75V, Width=0.031inch
R15: library part CMP-2100-03664-1, "Chip Resistor, 10 KOhm, +/- 1%, 01 W, -55 to 155 degC, 0603 (1608 Metric), RoHS, Tape and Reel", Case Code (Imperial)=0603, Case Code (Metric)=1608, Manufacturer=Yageo, Max Operating Temperature=155degC, Min Operating Temperature=-55degC, Package Description="2-Pin Surface Mount Device, Body 1.6 x 0.8 mm", Power Rating=100mW, Resistance=10KOhm, Temperature Coefficient=100ppm/degreesC, Tolerance=1%, Voltage Rating=75V, Voltage Rating (DC)=50V, Case/Package=0603, Composition=ThickFilm, Datasheet URL=http://www.yageo.com/NewPortal/yageodocoutput?fileName=/pdf/R-Chip/PYu-RC_Group_51_RoHS_L_5.pdf, Datasheet Version="Rev. 5, 10/2016", Depth=0.8mm, Height=0.45mm, Lead Free=LeadFree, Lead Pitch=0.3mm, Length=1.6mm, Manufacturer URL=http://www.yageo.com/, Military Standard=Not, Number of Pins=2, Package Reference=0603, Packaging=TapeandReel, REACH SVHC=NoSVHC, RoHSCompliant=true, Termination=SMD/SMT, Weight=7.1E-05oz, Width=0.8mm
SW5: library part CMP-1437-00001-1, "WS-DISV 2.54 mm small compact SMD Dip Switch with top tape", Manufacturer="Wuerth Elektronik", ComponentLink1Description="Manufacturer URL", ComponentLink1URL=http://www.we-online.com, ComponentLink2Description=Datasheet, ComponentLink2URL=http://katalog.we-online.de/em/datasheet/4181211608xx.pdf, NoPins=02, PackageReference=418121160801, PartNumber=418121160801
SWT1 SWT2 SWT3 SWT4: Supplier Part Number 1=100SP3T1B1M2QE-ND, Supplier 1=Digi-Key
TP1 TP2 TP3 TP4 TP5 TP_GND: "Test Point"
U1: Supplier Part Number 1=1589-1972-ND, Supplier 1=Digi-Key

## Via types
v1: diameter 50, hole 28, Top Layer to Bottom Layer, 29 vias

## Nets (pads, with @x,y where several pads share a name; then routed paths per layer and width w, separated by ;. In a path a pad name is that pad's centre, name@x,y a point inside that pad or via, vN(x,y) a via of type N, cw(c..) or ccw(c..) an arc to the next point about the centre after c; other vN are vias at no path point)
5V: C1.2 C2.2 C4.2 C7.2 C9.2 HS1.1 HS2.1 HS3.1 R1.2 R2.2 R6.2 SW5.1 SWT1.2 SWT2.2 SWT4.2 U1.9 | length 1185
  Top Layer w30: R1.2@4982.95,3001.57 R1.2 4981.9,2999.68 v1(5056.71,2999.68) ; HS1.1 5020.79,2514.21 5184.21,2514.21 C4.2 5185.79,2514.21 5274.21,2514.21 v1(5275,2515) ; v1(5285,3870) SW5.1 ; v1(5925,3820) 5924.26,3820.74 5924.26,3876.62 5926.69,3879.05 5926.69,3893.27 C9.2 ; C9.2@5930,3895 HS3.1 ; R6.2 6210,3808.43 v1(6210,3755) ; v1(6615,3840) 6615,3893.73 6621.69,3900.42 6621.69,3913.27 C7.2 ; C7.2@6625,3918.7 HS2.1 ; R2.2 6905,3803.43 v1(6905,3760)
  other v1: 4805,4175 4875,4175 4805,4245 4875,4245 4805,4315 4875,4315
D2_N: J2.2 J3.2 | length 2331.8
  Bottom Layer w11: J3.2 6384.67,2449.34 6410.47,2449.34 6437.44,2476.31 6437.44,2508.72 6414.53,2531.64 6382.12,2531.64 6373.28,2522.8 6364.17,2522.8 6357.73,2529.25 6357.73,2538.36 6411,2591.63 6411,4481.39 6439.37,4509.76 J2.2
D2_P: J2.3 J3.3 | length 2324.9
  Bottom Layer w11: J3.3 6305.66,2378.49 6305.66,2431.77 6348.61,2474.73 6348.61,2507.25 6335.73,2520.14 6335.73,2547.47 6389,2600.75 6389,4481.39 6360.63,4509.76 J2.3
D4_N: J4.2 J6.2 | length 2331.4
  Bottom Layer w11: J6.2 5700.53,2449.34 5726.33,2449.34 5753.3,2476.31 5753.3,2508.72 5730.39,2531.64 5697.98,2531.64 5689.14,2522.8 5680.03,2522.8 5673.58,2529.25 5673.58,2538.36 5726,2590.78 5726,4481.39 5754.37,4509.76 J4.2
D4_P: J4.3 J6.3 | length 2324.6
  Bottom Layer w11: J6.3 5621.51,2378.49 5621.51,2431.77 5664.47,2474.73 5664.47,2507.25 5651.58,2520.14 5651.58,2547.47 5704,2599.89 5704,4481.39 5675.63,4509.76 J4.3
GND: C1.1 C2.1 C3.1 C4.1 C5.2 C6.2 C7.1 C8.2 C9.1 C10.2 D3.2 D4.2 D6.2 D7.2 HS1.2 HS2.2 HS3.2 J1.4 J1.5 J1.6 J2.4 J2.7 J2.SH1 J2.SH2 J3.4 J3.7 J3.Shell J4.4 J4.7 J4.SH1 J4.SH2 J5.4 J5.5 J5.6 J6.4 J6.7 J6.Shell P1.1 P2.1 R3.1 R9.2 R10.2 R11.2 R12.2 R13.2 R14.2 TP_GND.Power U1.3 U1.8 | length 2657.5
  Top Layer w30: D4.2 4171.1,2468.9 4205,2435 v1(4450,2435) ; v1@4453.3,2425.25 4463.05,2435 C5.2@4630.3,2435 ; C5.2@4630.6,2435 4630,2435.6 4630,2510 4690,2570 R9.2 ; v1(4665,4370) 4665.55,4370.55 4665.55,4469.45 D6.2 ; U1.3@4810,3256.88 U1.3 ; U1.8 4965.06,3970 4982.64,3987.57 C2.1 C1.1 ; HS1.2 5020.79,2565.79 5184.21,2565.79 C4.1 5186.73,2568.31 5237.9,2568.31 5269.59,2600 v1(5275,2600) v1@5278.83,2603.83 ; J4.7@5712.73,4523.68 J4.7 ; C8.2@5930.36,4348 C8.2 5930.98,4347.64 5932.72,4349.37 5932.72,4387.72 5964.59,4419.59 v1(5964.59,4425) 5995,4394.59 R13.2 ; HS3.2 5980,4005.41 5985,4000.41 v1(5985,3995) 5983.29,3993.29 5983.29,3898.29 5980.79,3895.79 5980.79,3893.82 5984.41,3890.2 R14.2 ; v1(6120,2910) 6119.45,2909.45 D7.2@6040.55,2909.45 ; J2.7@6397.3,4523.25 J2.7 ; C6.2 6620.36,4363 6620.36,4400.36 v1(6655,4435) ; v1@6662.49,4422.1 6683.45,4401.14 6683.45,4365.35 6684.25,4365.35 R11.2 ; R12.2 6674.41,3841.5 6675.49,3842.58 6675.49,3913.92 C7.1 6674.84,3916.73 v1@6674.84,4015 ; v1(6675,4015) HS2.2 ; D3.2@6729.45,2909.45 D3.2 6730.55,2909.45 6814.45,2909.45 v1(6815,2910) ; D7.2@6040.55,2909.45 D7.2 D7.2@6040.55,2909.45
  Bottom Layer w30: C10.2@4884.61,3880 C10.2@4884.61,3880.27 ; C10.2@4884.84,3880.5 v1@4939.09,3880.5 ; R3.1 4887.48,3802.45 4889.21,3800.72 4933.87,3800.72 4944.59,3790 v1(4950,3790)
  other v1: 4810,3355 4810,3425 5025,3790 4950,3875 5025,3875 5025,3945
NetC3_2: C3.2 R4.2 R15.1 SWT3.1 TP1.Power U1.4 | length 1796.8
  Top Layer w40: R4.2 SWT3.1@4479.61,2745 ; SWT3.1 4482.5,2737.5 4672.5,2737.5 4772.6,2837.6 4772.6,3006.42 4783.11,3016.93 C3.2 4883.1,3016.93 4906.54,3040.36 4906.54,3261.54 U1.4 5010,3265 5140,3395 TP1.Power
  Bottom Layer w40: R15.1 4875,3510 4910,3475 U1.4
NetC5_1: C5.1 HS1.6 J1.1 TP2.Power | length 819.6
  Top Layer w30: C5.1@4674.37,2433.27 4675.58,2434.47 4675.58,2460.58 4730,2515 HS1.6 ; J1.1 C5.1@4675,2432.36 ; HS1.6@4920,2513.6 4920,2455 4990,2385 5145,2385 TP2.Power
NetC6_1: C6.1 HS2.6 J2.1 TP3.Power | length 725.5
  Top Layer w30: J2.1 6609.73,4585 6664.73,4530 TP3.Power ; 6606.26,4585 6606.26,4481.26 6577.28,4452.28 6577.28,4335.55 6591.93,4320.91 6615.47,4320.91 6625,4311.38 HS2.6
NetC8_1: C8.1 HS3.6 J4.1 TP4.Power | length 870.6
  Top Layer w30: J4.1 5890,4585 5901.54,4573.46 5948.49,4573.46 ; HS3.6 C8.1@5930,4301.38 ; C8.1 5928.27,4304.09 5895.91,4304.09 5865,4335 5865,4425 5948.49,4508.49 5948.49,4573.46 ; TP4.Power 6151.97,4378.03 6151.97,4418.03 5996.54,4573.46 5948.49,4573.46
NetC10_1: C10.1 U1.10 | length 218.8
  Bottom Layer w10: U1.10 4855,4025 4855,3951.36 4830.47,3926.83 C10.1
NetD1_1: D1.1 R1.1 | length 84.5
  Top Layer w30: D1.1 R1.1
NetD1_2: D1.2 HS1.4 | length 185.3
  Top Layer w10: HS1.4@4939.36,2622.5 4931.86,2615 HS1.4 4915,2620 4915,2700 4935,2720 4973.9,2720 D1.2
NetD2_1: D2.1 R2.1 | length 169.5
  Top Layer w30: R2.1@6875,3891.57 D2.1
NetD2_2: D2.2 HS2.4 | length 150.5
  Top Layer w10: HS2.4 6726.1,4198.9 D2.2
NetD3_1: D3.1 R5.2 | length 134.5
  Top Layer w30: R5.2 D3.1
NetD4_1: D4.1 R4.1 | length 120.7
  Top Layer w40: D4.1 R4.1@4429.61,2560
NetD5_1: D5.1 R6.1 | length 176.6
  Top Layer w30: R6.1 6187.5,3889.07 6187.5,4058.6 D5.1
NetD5_2: D5.2 HS3.4 | length 161.6
  Top Layer w10: HS3.4 6033.9,4198.9 D5.2
NetD6_1: D6.1 R7.1 | length 164.5
  Top Layer w30: D6.1 R7.1
NetD7_1: D7.1 R8.2 | length 129.5
  Top Layer w30: R8.2 D7.1
NetF3_1: F3.1 P1.2 | length 190
  Top Layer w40: F3.1 4230.73,3461.95 4230.73,3649.9 P1.2
NetF3_2: F3.2 SWT3.2 | length 305.1
  Top Layer w40: F3.2 4230,2943.43 4253.43,2920 SWT3.2
NetHS1_3: HS1.3 R10.1 SWT1.1 | length 336.9
  Top Layer w10: HS1.3 5020.3,2615.3 5099.7,2615.3 R10.1 5210.59,2615.59 5270.86,2675.86 5270.86,2730.86 SWT1.1
NetHS1_5: HS1.5 R9.1 | length 125.4
  Top Layer w10: R9.1@4794.61,2565 HS1.5
NetHS2_3: HS2.3 R12.1 SWT2.1 | length 377.6
  Top Layer w10: SWT2.1@6725,3725 6725.59,3725.59 R12.1 6722.8,3842.8 6725.3,3845.3 6725.3,4099.7 HS2.3
NetHS2_5: HS2.5 R11.1 | length 128.1
  Top Layer w10: R11.1@6674.61,4325 6675,4324.61 HS2.5 ; R11.1@6682.05,4315.39 R11.1
NetHS3_3: HS3.3 R14.1 SWT4.1 | length 382.6
  Top Layer w10: HS3.3 6032.8,4092.2 6032.8,3827.8 R14.1 6035.3,3824.7 6035.3,3715.3 SWT4.1
NetHS3_5: HS3.5 R13.1 | length 113.3
  Top Layer w10: HS3.5 5980,4288.35 5992.05,4300.39 R13.1
NetJ3_1: J3.1 R5.1 | length 416.3
  Top Layer w30: J3.1 6668.78,2413.78 6730,2475 R5.1
NetJ5_1: J5.1 P2.2 R7.2 SW5.2 TP5.Power | length 1181.1
  Top Layer w30: J5.1@4802.8,4634.06 4802.8,4607.2 4845,4565 4990,4565 5021.86,4533.14 5021.86,4470.29 R7.2 ; P2.2 5090,4742.91 5090,4487.57 5072.43,4470 R7.2 ; TP5.Power 5245.74,4484.26 5258.17,4484.26 5290,4452.43 5290,4363.64 SW5.2@5285,4358.64 ; SW5.2 5076.77,4353.23 5021.57,4408.43 R7.2
NetJ6_1: J6.1 R8.1 | length 415.4
  Top Layer w30: J6.1 5978.78,2413.78 6040,2475 R8.1
NetR3_2: R3.2 U1.7 | length 179.9
  Bottom Layer w10: U1.7 4810,3956.47 4797.51,3943.98 4797.51,3837.43 4803.37,3831.57 4810.79,3831.57 4822.52,3819.84 R3.2
NetR15_2: R15.2 U1.2 | length 300.8
  Bottom Layer w10: U1.2 4710,3495 4725,3510 R15.2 4755.47,3506.06 R15.2@4744.72,3495.31
SSRX2_N: J2.5 J3.5 | length 2061.5
  Bottom Layer w11.5: J3.5 6231,2493.93 6254.2,2517.12 6254.2,3499.08 6270.64,3515.52 6270.64,4497.82 J2.5
SSRX2_P: J2.6 J3.6 | length 2061.5
  Bottom Layer w11.5: J3.6 6299.9,2493.93 6276.7,2517.12 6276.7,3489.76 6293.14,3506.2 6293.14,4497.82 J2.6
SSRX4_N: J4.5 J6.5 | length 2061.1
  Bottom Layer w11.5: J6.5 5546.86,2493.93 5570.06,2517.12 5570.06,3499.51 5585.64,3515.09 5585.64,4497.82 J4.5
SSRX4_P: J4.6 J6.6 | length 2061.1
  Bottom Layer w11.5: J6.6 5615.75,2493.93 5592.56,2517.12 5592.56,3490.19 5608.14,3505.77 5608.14,4497.82 J4.6
SSTX2_N: J2.8 J3.8 | length 2060.1
  Bottom Layer w11.5: J2.8 6506.86,4497.82 6506.86,3504.52 6519.95,3491.44 6519.95,2517.12 6496.75,2493.93 J3.8
SSTX2_P: J2.9 J3.9 | length 2060.1
  Bottom Layer w11.5: J2.9 6529.36,4497.82 6529.36,3513.84 6542.45,3500.76 6542.45,2517.12 6565.64,2493.93 J3.9
SSTX4_N: J4.8 J6.8 | length 2060.5
  Bottom Layer w11.5: J4.8 5821.86,4497.82 5821.86,3504.95 5835.8,3491.01 5835.8,2517.12 5812.61,2493.93 J6.8
SSTX4_P: J4.9 J6.9 | length 2060.5
  Bottom Layer w11.5: J4.9 5844.36,4497.82 5844.36,3514.27 5858.3,3500.33 5858.3,2517.12 5881.5,2493.93 J6.9
pads on no net: J1.2 J1.3 J5.2 J5.3 MNT1.10 MNT2.10 MNT3.10 MNT4.10 SWT1.3 SWT2.3 SWT3.3 SWT4.3 U1.1 U1.5 U1.6 U1.11 U1.12

## Polygon pours and split planes (outlines as drawn)
GND on Top Layer "GND_L01_P005" (solid, pour order 5): 4825,3110 4825,3200 ccw(c4825,3232.5) 4857.5,3232.5 4857.5,3460 4755,3460 4755,3110
GND on Top Layer "GND_L01_P004" (solid, pour order 4): 4870,4010 5060,4010 5060,3740 4870,3740
5V on Top Layer "5V_L01_P003" (solid, pour order 3): 4770,4340 4770,4155 ccw(c4792.44,4152.45) 4790,4130 4845,4130 cw(c4845,4110) 4865,4110 4865,4065 ccw(c4910,4065) 4910,4020 ccw(c4910,4065) 4955,4065 4955,4310 ccw(c4920,4315) 4920,4350.35 4788.77,4350.35 ccw(c4785,4335.01)
no net on Top Layer "NONET_L01_P001" (solid, pour order 1): 4855,3995
5V on Power "5V_L02_P006" (solid, pour order 6): 3992.44,4993.25 3993.86,4994.67 6989.33,4994.67 6989.33,1995.67 6990,1995 3990,1995
GND on Ground "GND_L03_P007" (solid, pour order 7): 3995,4990 3995,2000 6985,2000 6985,4989.89 6985.93,4990.82

## Keep-outs
Top Layer:
  lines w10: 3990,1995 3990.32,1995.32 ; 6990,4990 6993.79,4993.79

## Other copper
Top Layer:
  region: 5581.5,3497.84
  region: 5579.28,3497.04
  region: 5579.28,3497.04
Bottom Layer:
  text "Power Board Rev G" at 4246.27,3785 h120 r270
  text "\"With Great Power...\"" at 4136.27,3765 h120 r270
  text "Developed by: Corey Huffman, Camilla Hallin, Jarrod Puseman" at 4048.81,2255 h100 r270

## Silkscreen, mask and mechanical layers (free items; w line width, h text height)
Mechanical 2:
  lines w10: 3990,1995 6990,1995 6990,4990 6985,4995 3990,4995 3990,1995